# Altium PCB H桥.PcbDoc
Units mm, origin at the board's own origin, x right, y up, seen from the top; angles counter-clockwise.
Board outline 152.4 x 101.6 mm, 2 copper layers (Top Layer, Bottom Layer); 33 components, 21 nets, 103 pads, 42 vias.
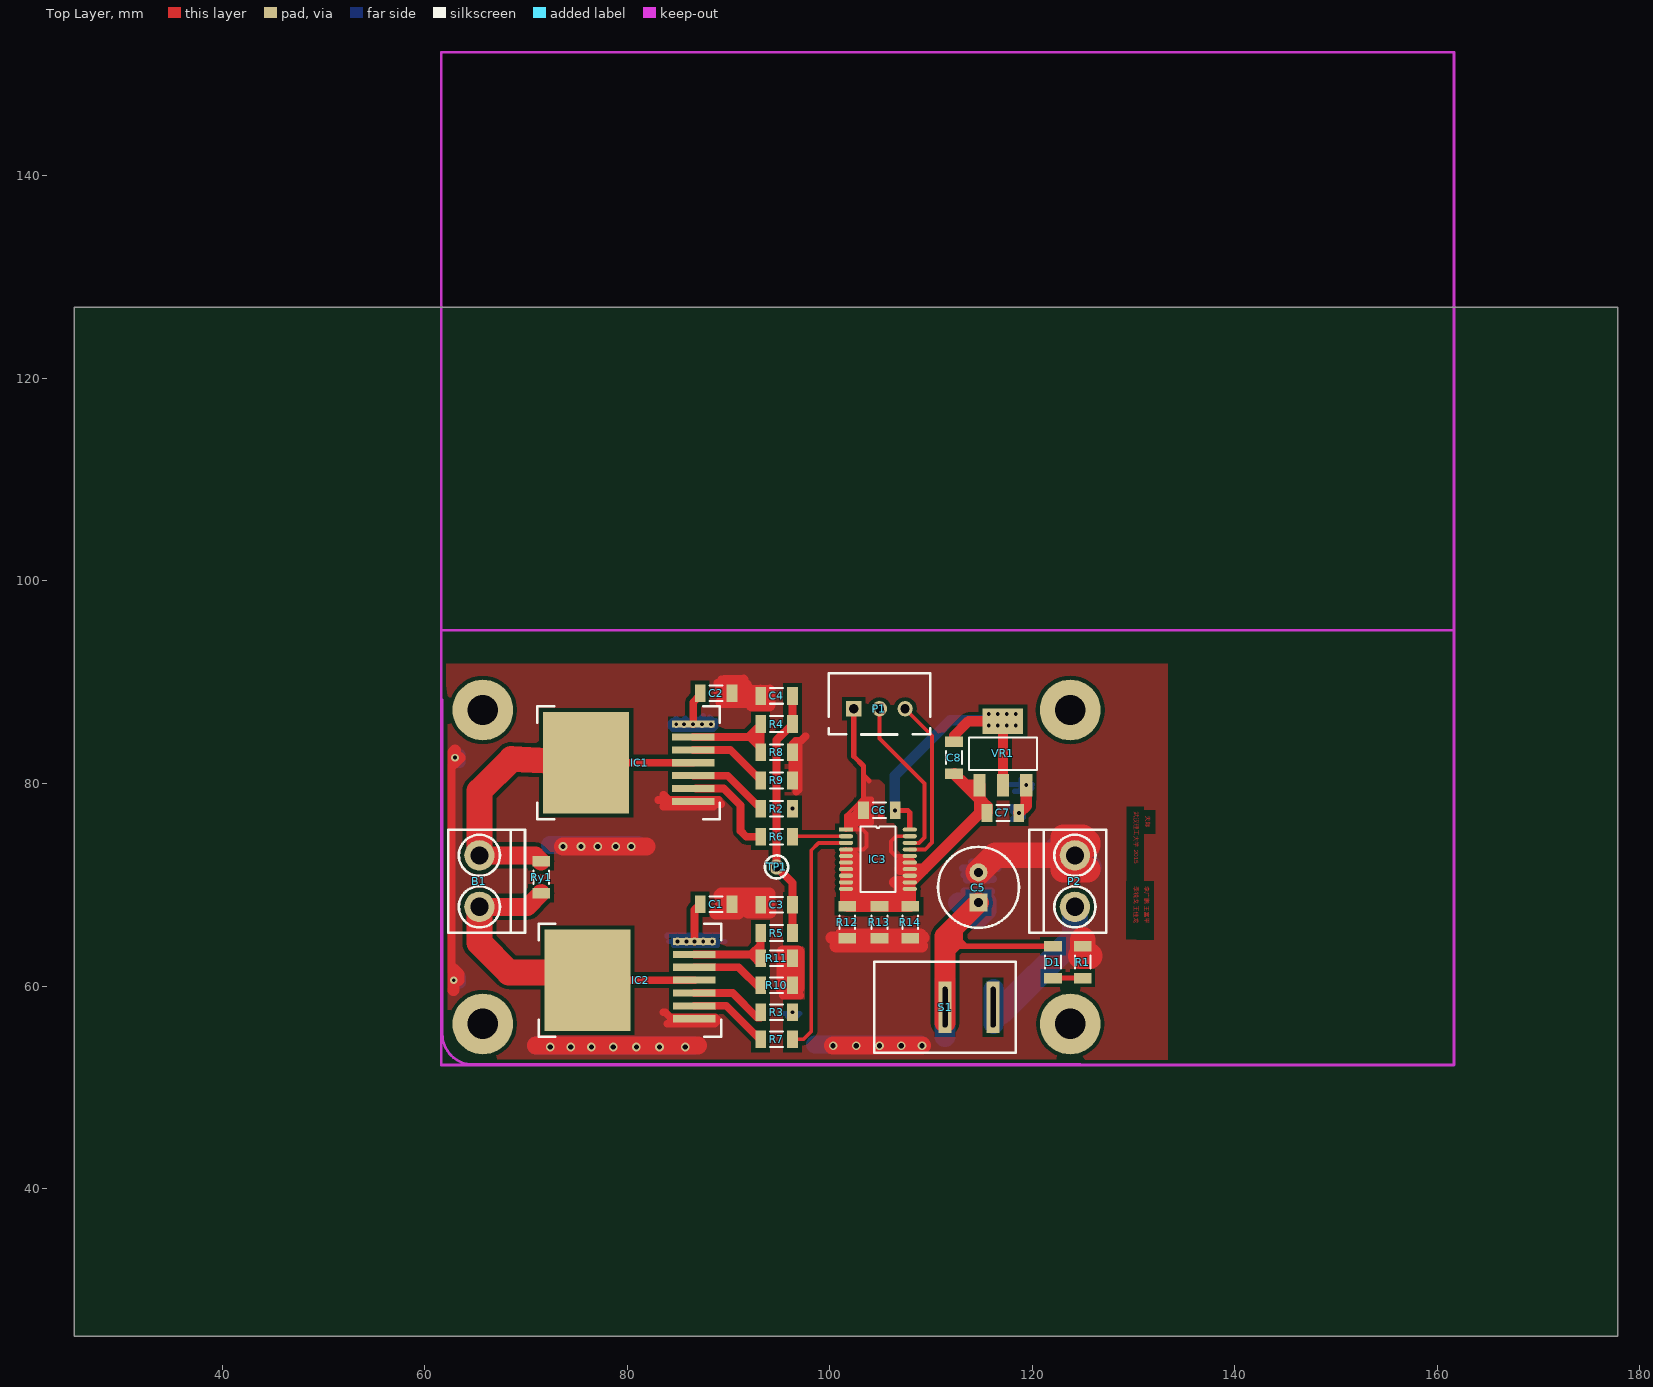
[diagram p0: Top Layer view]
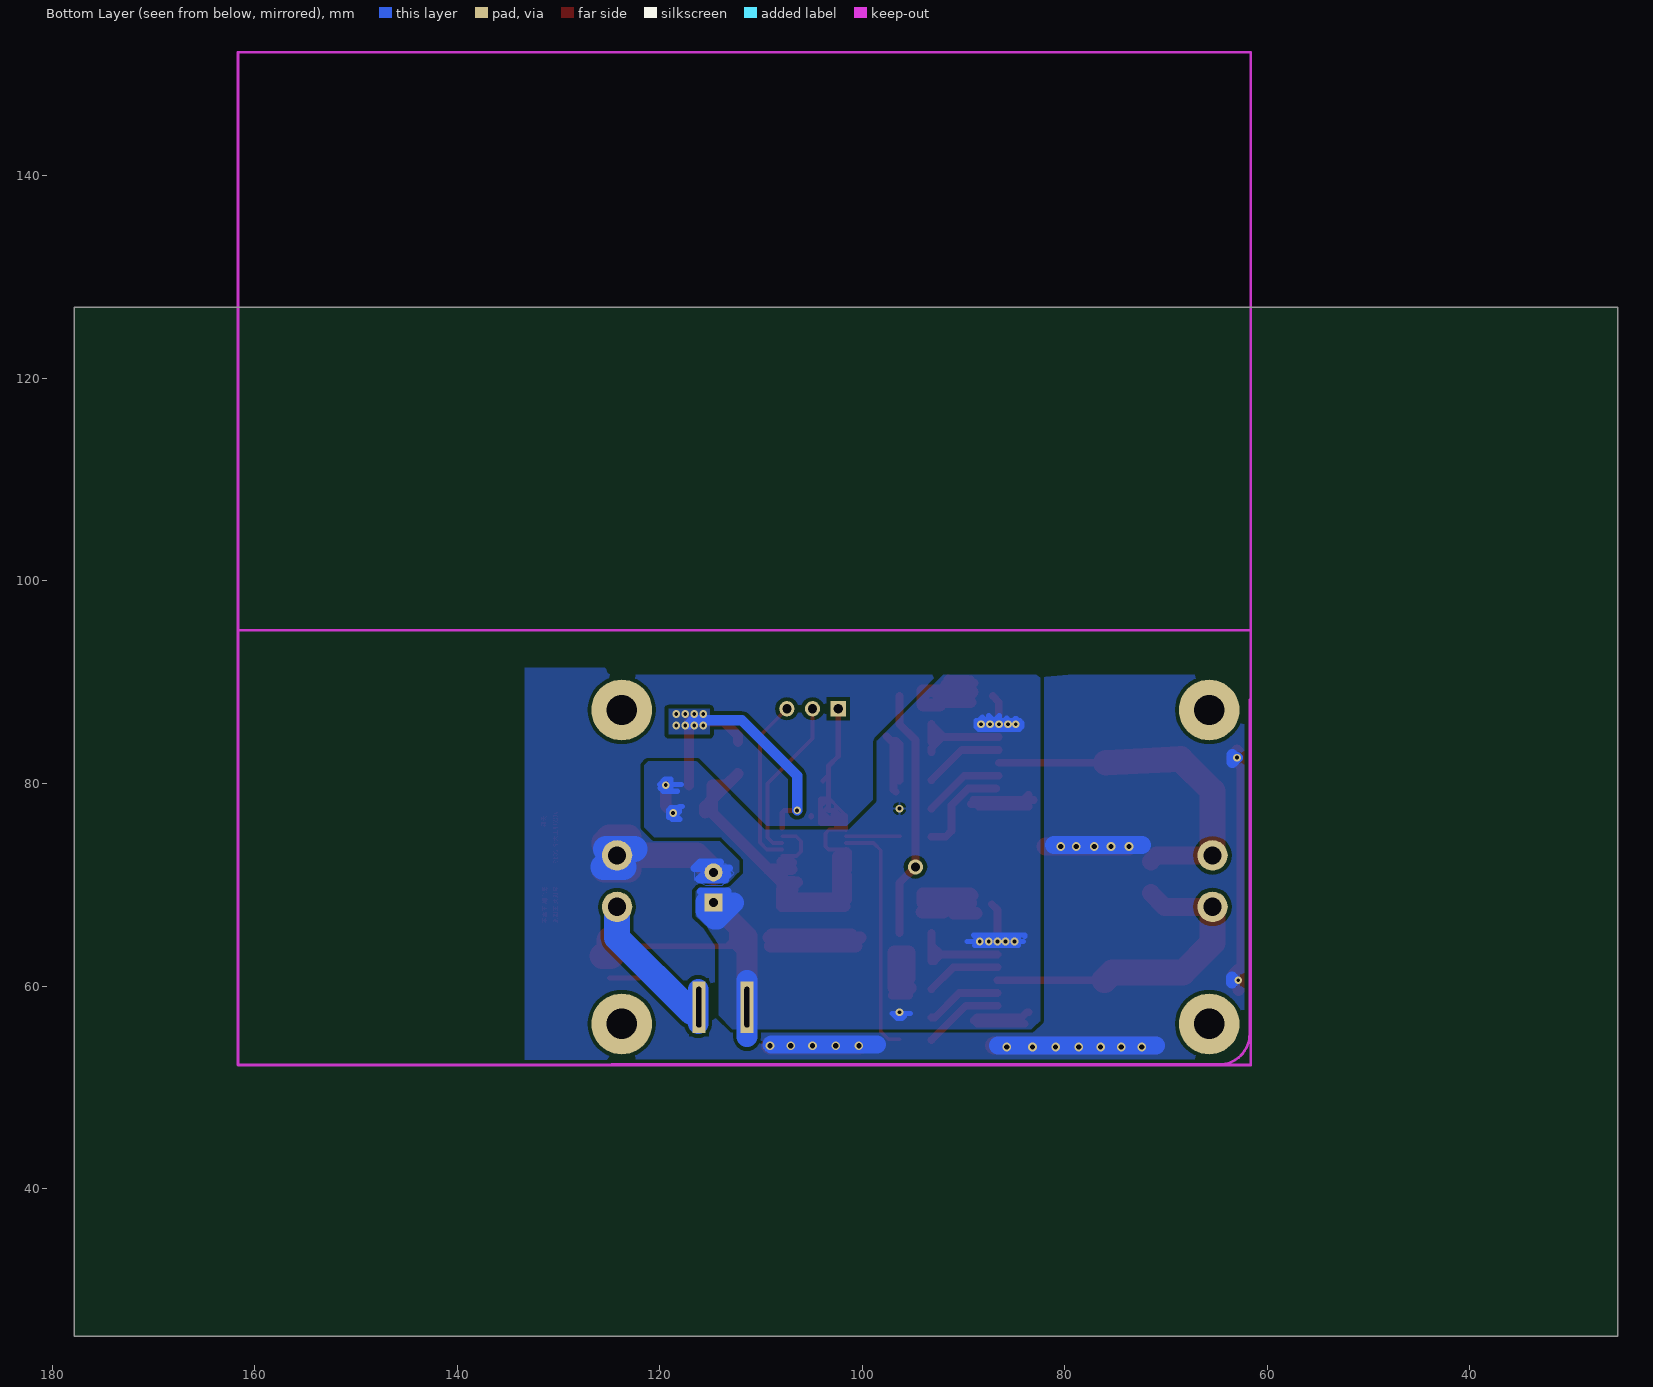
[diagram p1: Bottom Layer view, seen from below]

## Layer stack, top to bottom
Top Layer: signal copper 0.0356
Dielectric: dielectric 0.32, FR-4, Dk 4.8
Bottom Layer: signal copper 0.0356

## Board outline
25.4,25.4 177.8,25.4 177.8,127 25.4,127

## Design rules (kind name [scope] priority, off if disabled: settings)
Clearance [All] p1: gap=0.381
PolygonConnect [All] p1: connectstyle=Relief reliefconductorwidth=0.254 reliefentries=4 polygonreliefangle="90 Angle" airgapwidth=0.254
RoutingVias [All] p1: holewidth=0.711 width=1.27 viastyle="Through Hole" minholewidth=0.711 minwidth=1.27 maxholewidth=0.711 maxwidth=1.27
SolderMaskExpansion [All] p1: expansion=0.102
Width [All] p1: maxlimit=25.4 minlimit=0.381 preferedwidth=1.524 toplayer_maxwidth=2.54 minimp=50.000000 maximp=50.000000 favimp=50.000000
28 further rules are at their usual default settings.

## Components (designator, comment, footprint, x,y, rotation, side; value= is the part's Value field where it differs from the comment)
B1 "Motor" KF301-2P 65.405,70.358 r90 top
C1 "Cap Pol1" 1206(2) 88.773,68.072 r0 top
C2 "Cap Pol1" 1206(2) 88.773,88.9 r0 top
C3 "Cap" 1206(2) 94.742,68.014 r0 top
C4 "Cap" 1206(2) 94.742,88.646 r0 top
C5 "330uF" Inductor/8mm 114.681,69.723 r0 top
C6 "100nF" 1206(2) 104.902,77.343 r0 top
C7 "10uF" 1206(2) 117.094,77.089 r180 top
C8 "10uF" 1206(2) 112.268,82.55 r270 top
D1 "LED" 1206(2) 122.047,62.357 r270 top
IC1 "BTN7960" PG-TO263-7-1 87.63,82.042 r90 top
IC2 "BTN7960" PG-TO263-7-1 87.757,60.579 r90 top
IC3 "74LVC245" "TSSOP20 74lvc245" 104.775,72.517 r0 top
P1 "Header 3" XH2.54_3P 104.902,87.376 r0 top
P2 "Header 2" KF301-2P 124.206,70.358 r270 top
R1 "10K" 1206(2) 124.968,62.357 r270 top
R2 "Res2" 1206(2) 94.742,77.516 r0 top
R3 "Res2" 1206(2) 94.742,57.404 r180 top
R4 "Res2" 1206(2) 94.742,85.864 r0 top
R5 "Res2" 1206(2) 94.742,65.232 r0 top
R6 "Res2" 1206(2) 94.742,74.734 r180 top
R7 "Res2" 1206(2) 94.742,54.737 r0 top
R8 "Res2" 1206(2) 94.742,83.081 r180 top
R9 "Res2" 1206(2) 94.742,80.299 r180 top
R10 "Res2" 1206(2) 94.742,60.071 r180 top
R11 "Res2" 1206(2) 94.742,62.738 r180 top
R12 "0R" 1206(2) 101.727,66.294 r90 top
R13 "0R" 1206(2) 104.902,66.294 r90 top
R14 "0R" 1206(2) 107.95,66.294 r90 top
Ry1 "" 1206(2) 71.501,70.739 r270 top
S1 "SW-SPST" switch-black 111.379,57.912 r90 top
TP1 "tp" TP1 94.742,71.755 r0 top
VR1 "LM1117-3.3" SOT-223 117.094,82.931 r0 top

## Footprints (in the part's own frame and the unit in brackets; to place one, negate y for a bottom-side part, rotate by r counter-clockwise, add the part's x,y. Pads: shape width x height; smd on the part's side, far side on the other; paste and mask are expansions set on the pad)
1206(2) [mm]
  rect 1.05x1.75 smd: 1(-1.575,0) 2(1.575,0)
  silkscreen extent -0.65,-0.77 0.65,0.77, body extent -1.6,-0.8 1.6,0.8, height 1.6
Inductor/8mm [mil]
  rect 70x70 hole 35: 1(0,-59.06)
  round 70 hole 35: 2(0,59.06)
  silkscreen extent -157,-157 157,158
KF301-2P [mm]
  round 3 hole 1.8: 1(-2.54,0) 2(2.54,0)
  silkscreen extent -5.08,-4.5 5.08,3.1
PG-TO263-7-1 [mm]
  rect 0.7x4.2 smd: 1(-3.81,1.123) 2(-2.54,1.123) 3(-1.27,1.123) 4(0,1.123) 5(1.27,1.123) 6(2.54,1.123) 7(3.81,1.123)
  rect 10x8.5 smd: 8(0,11.684)
  silkscreen extent -5.59,-1.52 5.59,16.51
SOT-223 [mm]
  rect 1.2x2.2 smd: 1(-2.3,-3.1) 2(0,-3.1) 3(2.3,-3.1)
  rect 4x2.5 smd: 4(0,3.2)
  silkscreen extent -3.35,-1.62 3.35,1.62
switch-black [mm]
  rect 4.5x0.7 on Top Overlay: 0(0,4.75)
  rect 5.08x1.27 hole 0.5 slot 4 at 0 deg: 1(0,-4.75) 2(0,0)
  silkscreen extent -4.5,-7 4.5,7
TP1 [mm]
  round 1.5 hole 0.9: 1(0,0)
  silkscreen extent -1.14,-1.14 1.14,1.14
"TSSOP20 74lvc245" [mm]
  rect 1.4x0.4 smd: 1(-3.175,2.921)
  oval 1.4x0.4 smd: 2(-3.175,2.271) 3(-3.175,1.621) 4(-3.175,0.971) 5(-3.175,0.321) 6(-3.175,-0.329) 7(-3.175,-0.979) 8(-3.175,-1.629) 9(-3.175,-2.279) 10(-3.175,-2.929) 11(3.125,-2.929) 12(3.125,-2.279) 13(3.125,-1.629) 14(3.125,-0.979) 15(3.125,-0.329) 16(3.125,0.321) 17(3.125,0.971) 18(3.125,1.621) 19(3.125,2.271) 20(3.125,2.921)
  silkscreen extent -1.74,-3.25 1.69,3.25
XH2.54_3P [mm]
  rect 1.5x1.5 hole 0.9: 1(-2.54,0)
  round 1.5 hole 0.9: 2(0,0) 3(2.54,0)
  silkscreen extent -5,-2.54 5,3.5

## Part data
B1: library part "Motor Servo", "Servo Motor"
C1 C2: "Polarized Capacitor (Radial)"
C3 C4: "Capacitor"
C5 C7 C8: library part "Cap Pol1", "Polarized Capacitor (Radial)"
C6: library part Cap, "Capacitor"
D1: "Typical INFRARED GaAs LED"
P1: "Header, 3-Pin"
P2: "Header, 2-Pin"
R1 R12 R13 R14 Ry1: library part Res, "Resistor"
R2 R3 R4 R5 R6 R7 R8 R9 R10 R11: "Resistor"
S1: "Single-Pole, Single-Throw Switch"
TP1: library part TP
VR1: library part Volt_Reg_1117, "Voltage Regulator"

## Free pads (board coordinates)
  round 6 hole 3: ""(65.742,56.255) ""(65.742,87.255) ""(123.742,56.255) ""(123.742,87.255)

## Via types
v1: diameter 0.762, hole 0.381, Top Layer to Bottom Layer, 25 vias
v2: diameter 0.864, hole 0.508, Top Layer to Bottom Layer, 17 vias

## Nets (pads, with @x,y where several pads share a name; then routed paths per layer and width w, separated by ;. In a path a pad name is that pad's centre, name@x,y a point inside that pad or via, vN(x,y) a via of type N, cw(c..) or ccw(c..) an arc to the next point about the centre after c; other vN are vias at no path point)
EGND: C1.2 C2.2 C3.1 C4.1 C5.2 IC1.1 IC2.1 P2.1 R1.1 R8.1 R9.1 R10.1 R11.1 R12.1 R13.1 R14.1 | length 285.4
  Top Layer w0.737: 89.569,90.366 91.498,90.366
  Top Layer w0.762: 62.644,59.861 62.644,82.982 ; 83.058,78.359 84.122,78.359 ; 83.566,57.404 83.741,57.404 84.249,56.896 88.681,56.896 88.972,56.604 88.629,56.261 83.947,56.261 ; 83.566,77.724 88.511,77.724 ; 83.566,78.867 83.614,78.867 84.122,78.359 ; IC1.1@86.761,77.978 89.281,77.978 ; 89.281,90.297 90.829,90.297 ; 91.498,90.366 91.567,90.297 90.829,90.297 ; 91.694,89.662 91.44,89.916 90.448,89.916 ; R10.1@96.317,59.667 96.317,59.817 R10.1@96.317,59.995 ; 96.317,61.2 R10.1 ; R11.1@96.317,62.449 R10.1 ; R9.1 R8.1 96.317,83.871 96.647,84.201 ; 96.696,79.17 96.901,79.375 96.901,83.947 96.647,84.201 ; 97.096,59.041 97.082,59.055 95.377,59.055 96.139,59.817 R10.1@96.317,59.995 ; 97.604,84.673 97.158,84.227 96.673,84.227 96.647,84.201 ; 84.122,78.359 89.027,78.359 88.9,78.232 IC1.1 84.249,78.232 84.122,78.359 ; 90.448,89.916 90.321,89.789 90.321,89.689 90.348,89.662 89.154,89.662 88.9,89.916 90.448,89.916 ; 90.448,89.916 90.829,90.297 ; R10.1@96.317,59.995 R10.1
  Top Layer w1.143: v1(62.865,60.566) 62.865,59.607 62.821,59.563 62.821,61.722 63.363,61.181 63.363,60.564 ; v1(62.992,82.55) v1@62.992,82.634 ; 63.45,82.556 62.821,81.928 v1@62.821,82.805 ; 89.281,88.011 91.821,88.011 ; R12.1 R13.1 R14.1 ; v1@62.821,82.805 62.821,83.098 62.992,83.268 v1@62.992,82.634 ; v1@62.821,82.805 v1@62.992,82.634
  Top Layer w1.27: 88.773,67.183 90.932,67.183 C1.2@89.916,68.199 ; 89.281,68.199 C1.2@89.916,68.199 ; 89.281,88.9 89.154,89.027 92.075,89.027 92.456,88.646 91.948,88.138 92.329,87.757 93.98,87.757 93.98,89.154 91.186,89.154 91.694,89.662 ; 91.948,67.31 94.107,67.31 ; 95.25,59.817 R10.1@95.859,59.817 ; 100.203,64.77 R12.1@101.072,64.77 ; 100.598,63.94 109.079,63.94 108.523,64.496 101.072,64.496 R12.1@101.072,64.77 ; C1.2@89.916,68.199 89.154,68.961 89.302,69.109 93.98,69.109 93.98,68.199 C1.2@89.916,68.199 ; R10.1@95.859,59.817 95.538,60.138 95.538,60.545 95.371,60.712 95.371,63.341 96.855,63.341 96.878,63.318 96.878,59.817 96.317,59.817 96.139,59.817 R10.1@95.859,59.817 ; R12.1@101.072,64.77 109.22,64.77 108.966,65.024 101.072,65.024 R12.1@101.072,64.77
  Top Layer w1.778: 70.993,54.102 86.995,54.102 ; v2(73.66,73.787) v2(75.438,73.787) v2(77.089,73.787) v2(78.867,73.787) v2(80.391,73.787) 81.915,73.787 ; v2(100.33,54.102) v2(102.616,54.102) v2(104.902,54.102) v2(107.061,54.102) v2(109.093,54.102)
  Top Layer w2.54: C5.2 116.356,72.898 P2.1@123.063,72.898 ; P2.1 P2.1@123.063,72.898 ; 124.768,62.958 125.672,62.958 ; R1.1 124.968,64.54 ; 125.476,71.501 123.063,71.501 P2.1@123.063,72.898 ; 125.476,73.914 125.476,74.168 124.968,74.676 123.063,74.676 P2.1@123.063,72.898
  Bottom Layer w0.762: 113.157,71.628 116.586,71.628 115.993,72.221 114.049,72.221 ; 113.284,70.993 C5.2@114.371,70.993 ; 113.538,70.485 113.943,70.485 ; C5.2 C5.2@114.451,70.993 ; C5.2@115.245,70.739 C5.2@114.625,70.739 ; 116.113,70.577 115.789,70.577 ; 113.943,70.485 C5.2@114.979,70.485 ; 113.943,70.485 113.863,70.485 114.117,70.739 C5.2@114.197,70.739 ; C5.2@114.197,70.739 C5.2@114.625,70.739 ; C5.2@114.197,70.739 C5.2@114.411,70.953 ; C5.2@114.197,70.739 114.035,70.577 115.789,70.577 ; C5.2@114.371,70.993 C5.2@114.451,70.993 ; C5.2@114.371,70.993 C5.2@114.411,70.953 ; C5.2@114.411,70.953 C5.2@114.451,70.993 ; C5.2@114.411,70.953 C5.2@114.625,70.739 ; C5.2@114.451,70.993 C5.2@114.991,70.993 ; C5.2@114.979,70.485 115.697,70.485 115.789,70.577 ; C5.2@114.979,70.485 115.499,70.485 C5.2@114.991,70.993 ; C5.2@114.991,70.993 115.697,70.993 115.951,70.739 115.789,70.577
  Bottom Layer w1.143: v1(62.992,82.55) 63.45,82.092 63.45,82.854 ; 63.487,60.312 63.487,60.86
  Bottom Layer w1.778: 70.993,54.102 86.614,54.102 ; 72.39,73.914 81.066,73.914 ; 98.552,54.229 v2@108.966,54.229
  Bottom Layer w2.54: 122.477,73.533 125.327,73.533 123.549,71.755 125.583,71.755
  other v2: 72.39,53.975 74.422,53.975 76.454,53.975 78.613,53.975 80.899,53.975 83.185,53.975 85.725,53.975
GND: C6.1 C7.2 C8.2 IC3.1 IC3.4 IC3.5 IC3.6 IC3.7 IC3.8 IC3.9 IC3.10 IC3.11 IC3.12 IC3.13 IC3.14 IC3.15 IC3.16 IC3.19 P1.1 R12.2 R13.2 R14.2 VR1.1 | length 96.5
  Top Layer w0.381: IC3.4 103.333,73.488 103.632,73.787 103.632,75.057 103.251,75.438 IC3.1 ; 101.6,76.835 101.727,76.962 ; C6.1@102.946,76.962 102.616,76.962 ; 103.327,78.359 103.124,78.359 102.616,77.851 ; IC3.16 106.486,72.838 106.045,73.279 106.045,74.295 106.538,74.788 IC3.19 ; 101.727,76.962 102.235,76.962 ; 101.727,76.962 102.616,77.851 ; 102.235,76.962 102.616,77.343 ; 102.235,76.962 102.616,76.962 ; 102.616,76.962 102.616,77.343 ; 102.616,77.343 102.616,77.851
  Top Layer w0.432: IC3.1 101.6,76.835
  Top Layer w0.508: IC3.8 IC3.7 ; 102.108,76.073 102.554,76.073 ; P1.1 102.362,82.677 103.327,81.712 103.327,80.823 ; 102.616,77.343 C6.1 C6.1@103.327,77.693 ; 103.815,78.288 103.815,78.181 C6.1@103.731,78.181 ; 103.886,80.264 103.505,80.645 ; 105.029,76.708 105.029,76.835 ; 106.68,70.612 107.9,70.612 ; R14.2@107.9,68.173 107.9,68.648 107.9,69.52 IC3.11 ; IC3.12 107.9,70.612 ; IC3.13 107.9,70.612 ; 102.554,76.073 104.072,76.073 104.106,76.107 104.106,76.674 ; 102.554,76.073 102.554,75.692 101.981,75.692 101.981,76.454 101.854,76.581 103.333,76.581 103.886,77.134 C6.1@103.327,77.693 ; 102.554,76.073 102.554,76.135 103.567,76.135 104.106,76.674 ; C6.1@103.327,77.693 C6.1@103.327,78.181 ; C6.1@103.327,78.181 103.327,78.359 103.327,80.645 ; C6.1@103.327,78.181 C6.1@103.731,78.181 ; 103.327,80.645 103.505,80.645 ; 103.327,80.645 103.327,80.823 ; 103.327,80.823 103.505,80.645 ; C6.1@103.731,78.181 103.44,78.472 104.106,78.472 104.106,77.806 ; C6.1@103.731,78.181 104.106,77.806 ; 104.106,76.674 104.106,77.806
  Top Layer w1.143: 101.6,68.504 IC3.10 IC3.9 IC3.8 ; IC3.7 IC3.6 IC3.5 101.6,73.152 ; R12.2 102.427,68.569 102.427,68.648 ; 101.744,68.648 102.427,68.648 ; R12.2@101.854,67.869 R13.2 R13.2@105.029,67.869 ; 102.427,72.833 102.427,68.648 ; R13.2@105.283,67.869 R14.2 107.95,68.648 ; 106.433,70.238 IC3.12 ; 106.883,69.52 107.9,69.52 107.95,69.52 107.95,68.648 ; 106.971,71.538 IC3.14 ; 107.009,72.188 IC3.15 ; IC3.11 IC3.12 ; IC3.13 IC3.14 ; IC3.15@107.9,72.263 IC3.15 ; C8.2 113.412,79.831 ; C7.2 115.519,77.724 114.794,78.449 ; 102.427,68.648 107.9,68.648 107.95,68.648 ; IC3.12 107.957,70.238 109.257,71.538 ; IC3.14 IC3.15 ; IC3.14 109.257,71.538 ; 109.257,71.538 114.794,77.075 114.794,78.449 ; 113.412,79.831 VR1.1 114.794,78.449 ; 113.412,79.831 114.794,78.449
MOTTO_IN1: IC3.2 R6.1 | length 5.3
  Top Layer w0.381: R6.1@96.281,74.788 IC3.2
MOTTO_IN2: IC3.3 R7.2 | length 23.8
  Top Layer w0.381: R7.2 97.409,54.737 98.171,55.499 98.171,73.406 98.903,74.138 IC3.3
NetB1_1: B1.1 IC2.4 IC2.8 Ry1.2 | length 33
  Top Layer w0.762: IC2.8 IC2.4
  Top Layer w1.778: B1.1 70.155,67.818 Ry1.2
  Top Layer w2.54: B1.1 65.405,64.262 68.326,61.341 75.311,61.341 IC2.8
NetB1_2: B1.2 IC1.4 IC1.8 Ry1.1 | length 35.1
  Top Layer w0.762: IC1.8 IC1.4
  Top Layer w1.778: B1.2 70.917,72.898 Ry1.1
  Top Layer w2.54: B1.2 65.405,79.248 68.58,82.423 IC1.8
NetC3_2: C3.2 C4.2 R4.2 R5.2 TP1.1 | length 24.7
  Top Layer w0.762: R5.2 C3.2 96.317,70.18 TP1.1 94.742,84.289 R4.2 C4.2
NetD1_2: D1.2 R1.2 | length 2.9
  Top Layer w0.508: D1.2 R1.2
NetIC1_2: IC1.2 R6.2 | length 9.9
  Top Layer w0.762: IC1.2@86.761,79.502 89.535,79.502 91.186,77.851 91.186,75.311 91.763,74.734 R6.2
NetIC1_3: IC1.3 R2.1 | length 8
  Top Layer w0.762: IC1.3 89.911,80.772 R2.1
NetIC1_5: IC1.5 R9.2 | length 7.9
  Top Layer w0.762: IC1.5 90.17,83.312 R9.2@93.167,80.315
NetIC1_6: IC1.6 R4.1 R8.2 | length 12.4
  Top Layer w0.762: IC1.6 91.885,84.582 R4.1 93.167,84.062 ; 92.278,84.455 92.659,84.074 92.583,84.074 ; 93.04,84.963 92.71,84.963 92.202,84.455 92.583,84.074 ; R8.2 93.167,83.49 92.583,84.074
NetIC2_2: IC2.2 R7.1 | length 7.9
  Top Layer w0.762: IC2.2 89.789,58.039 R7.1@93.167,54.661
NetIC2_3: IC2.3 R3.2 | length 7.5
  Top Layer w0.762: IC2.3 90.424,59.309 92.849,56.884 R3.2@93.167,56.884
NetIC2_5: IC2.5 R10.2 | length 7.4
  Top Layer w0.762: IC2.5 90.985,61.849 R10.2@93.167,59.667
NetIC2_6: IC2.6 R5.1 R11.2 | length 11.4
  Top Layer w0.762: IC2.6 92.202,63.119 ; R11.2@92.872,62.449 92.202,63.119 ; R11.2@92.913,63.119 92.202,63.119 ; R11.2@93.167,62.449 93.167,64.084 ; R5.1 93.167,64.084 ; 92.202,63.119 93.167,64.084
NetIC3_17: IC3.17 P1.3 | length 16.8
  Top Layer w0.381: P1.3 110.109,84.709 110.109,74.168 109.429,73.488 IC3.17
NetIC3_18: IC3.18 P1.2 | length 16.2
  Top Layer w0.381: P1.2 104.902,84.455 109.347,80.01 109.347,74.676 108.809,74.138 IC3.18
VCC: C1.1 C2.1 C5.1 C7.1 D1.1 IC1.7 IC2.7 R2.2 R3.1 S1.2 VR1.3 | length 114.1
  Top Layer w0.508: 111.787,64.921 112.23,64.478 ; 112.217,63.373 112.776,63.932 ; 112.368,63.932 112.776,63.932 ; 112.738,64.478 112.23,64.478 ; 112.903,65.405 112.903,64.478 ; D1.1 113.449,63.932 ; 112.23,64.478 112.776,63.932 ; 112.776,63.932 112.903,64.059 112.903,64.478 ; 112.776,63.932 113.449,63.932 ; 112.903,64.478 113.449,63.932
  Top Layer w0.762: v1(86.487,85.852) 86.507,85.872 86.507,88.031 C2.1@87.122,88.646 ; v1(86.634,64.389) 86.634,67.508 C1.1
  Top Layer w1.143: v1(118.669,77.089) 119.394,77.814 v1(119.394,79.831)
  Top Layer w2.032: S1.2@111.379,56.388 S1.2 111.379,64.921 C5.1
  Bottom Layer w0.508: 83.947,64.897 83.947,65.024 89.027,65.024 v1(88.392,64.389) ; 84.074,64.389 84.57,64.389 ; v1(84.836,85.852) v1(85.598,85.852) v1(86.487,85.852) v1(87.376,85.852) v1(88.265,85.852) 88.76,85.852 88.76,86.203 88.513,86.203 ; v1@88.265,64.516 87.903,64.878 84.57,64.878 84.57,64.389 ; 88.779,85.604 88.532,85.357 84.485,85.357 ; 89.662,64.389 v1@88.499,64.389 ; 95.25,57.277 97.028,57.277 96.533,56.782 96.069,56.782 95.84,57.011 95.873,57.011 ; 117.729,77.724 118.034,77.724 118.211,77.547 ; 117.856,79.883 118.91,79.883 ; 118.16,76.631 117.996,76.467 118.796,76.467 118.071,77.192 118.071,77.406 118.211,77.547 ; 118.222,79.233 119.642,79.233 119.975,79.566 118.91,79.566 118.91,79.883 ; 84.438,86.203 84.485,86.155 ; 84.438,86.203 84.485,86.203 ; 84.438,86.203 84.214,85.979 84.214,85.628 84.485,85.357 ; 84.485,85.357 84.485,86.155 ; 84.485,86.155 84.485,86.203 ; 84.485,86.155 84.788,85.852 v1@84.788,86.203 ; 84.485,86.203 v1@84.788,86.203 ; 84.57,64.389 84.57,63.996 88.893,63.996 v1@88.499,64.389 ; 84.57,64.389 v1(84.963,64.389) v1(85.852,64.389) v1(86.634,64.389) v1(87.503,64.389) v1(88.392,64.389) ; v1@84.788,86.203 85.084,86.203 ; v1@84.788,86.203 84.788,86.395 84.892,86.395 85.084,86.203 ; 85.084,86.203 v1@85.454,86.203 ; v1@85.454,86.203 85.996,86.203 ; v1@85.454,86.203 85.725,86.474 85.996,86.203 ; 85.996,86.203 86.735,86.203 ; 86.735,86.203 86.978,86.203 ; 86.735,86.203 86.463,86.474 86.463,86.717 86.978,86.203 ; 86.978,86.203 88.513,86.203 ; 86.978,86.203 87.503,86.728 87.503,86.33 87.89,86.33 88.138,86.578 88.513,86.203 ; v1(88.392,64.389) v1@88.499,64.389 ; 118.211,77.547 118.261,77.597 118.91,77.597 119.127,77.38 119.127,76.631 v1(118.669,77.089) 118.211,77.547 ; 118.91,79.883 120.015,79.883 119.469,80.429 118.91,80.429 118.91,79.883
  Bottom Layer w0.762: C5.1 114.403,68.223 113.284,69.342 115.951,69.342
  Bottom Layer w2.032: 111.379,54.991 S1.2 111.379,60.579 ; C5.1@114.403,68.223 112.673,68.223 114.3,66.596 114.602,66.596 115.443,67.437 115.443,68.326 114.784,68.326 C5.1
  other v1: 96.317,57.404 96.317,77.516
VCC3.3: C6.2 C8.1 IC3.20 VR1.2 VR1.4 | length 31.8
  Top Layer w0.508: C6.2 107.696,77.343 107.9,77.139 IC3.20@107.9,75.623
  Top Layer w1.016: C8.1 112.268,84.709 113.69,86.131 VR1.4 VR1.2
  Bottom Layer w1.016: v1(106.426,77.343) 106.426,80.772 111.887,86.233 116.713,86.233 117.094,85.852
  other v1: 115.697,85.725 116.586,85.725 117.475,85.725 118.364,85.725 115.697,86.868 116.586,86.868 117.475,86.868 118.364,86.868
VCCIN: P2.2 S1.1 | length 16.9
  Bottom Layer w2.032: S1.1@116.205,56.261 116.205,57.912 S1.1@116.205,59.69
  Bottom Layer w2.54: 116.84,57.404 124.206,64.77 P2.2
pads on no net: S1.0

## Polygon pours and split planes (outlines as drawn)
VCC3.3 on Bottom Layer "Top Layer-VCC3.3" (solid, pour order 2): 115.062,87.376 119.126,87.376 119.126,84.836 115.062,84.836 115.062,87.376
VCC on Bottom Layer "Top Layer-VCC" (solid, pour order 8): 83.058,90.932 83.185,90.805 91.694,90.805 91.948,90.805 93.853,88.9 98.552,84.201 98.552,78.232 101.473,75.311 101.6,75.438 108.839,75.438 109.601,75.438 116.205,82.042 116.332,82.169 120.904,82.169 121.158,82.169 121.539,81.788 121.539,75.946 121.539,75.692 121.285,75.438 120.523,74.676 113.919,74.676 112.014,72.771 111.633,72.39 110.49,71.247 98.552,71.247 95.758,74.041 86.868,74.041 83.82,74.041 82.677,75.184 82.423,75.438 82.423,90.424
VCC on Bottom Layer "Top Layer-VCC" (solid, pour order 14): 82.423,75.438 82.423,56.54 83.312,55.753 83.566,55.978 112.776,55.978 112.903,55.978 113.411,56.428 114.173,57.103 114.173,64.977 114.3,64.977 116.459,66.889 116.459,69.926 116.459,70.039 116.205,70.264 116.078,70.376 110.871,70.376 88.138,70.376 83.82,74.201
VCC on Bottom Layer "Top Layer-VCC" (solid, pour order 16): 83.439,77.089 84.328,76.2 98.044,76.2 98.679,76.2 100.838,74.041 100.965,73.914 111.76,73.914 111.76,71.12 112.141,70.739 113.284,69.596 113.284,68.961 113.284,67.691 111.76,66.167 110.998,66.929 83.312,66.929 83.312,76.708 83.439,76.835
VCC on Bottom Layer "Top Layer-VCC" (solid, pour order 22): 114.046,63.928 113.411,62.992 112.141,64.864 111.125,64.864 111.887,65.987 112.268,66.548 114.808,66.548 115.316,66.548 115.57,66.174
EGND on Bottom Layer "Top Layer-EGND" (solid, remove dead copper, pour order 26): 61.999,91.44 133.338,91.44 133.338,52.579 133.477,52.451 62.692,52.451 62.692,52.579 61.722,53.474 61.861,53.601 61.861,91.44
VCC on Bottom Layer "Top Layer-VCC" (solid, remove dead copper, pour order 28): 83.312,55.753 112.823,55.753 114.173,57.103 112.856,58.42 90.932,58.42 84.086,58.42 82.423,56.757 83.312,55.868 83.312,55.753
VCC on Bottom Layer "Top Layer-VCC" (solid, pour order 30): 104.49,75.438 99.332,75.438 99.06,74.824 100.418,71.755 102.047,71.755 105.305,71.755 106.934,75.438
EGND on Bottom Layer "Top Layer-GND" (solid, remove dead copper, pour order 34): 115.456,69.93 115.451,69.925 113.905,69.925 113.844,69.925 112.649,71.12 113.411,71.882 113.411,72.009 115.78,72.009 115.993,72.221 116.586,71.628 116.586,70.485
EGND on Top Layer "Top Layer-EGND" (solid, remove dead copper, pour order 24): 61.733,91.821 66.977,91.821 75.946,91.821 85.605,91.821 100.232,91.821 113.065,91.821 131.832,91.821 133.35,91.821 133.35,82.43 133.35,77.026 133.35,52.197 120.931,52.197 107.822,52.197 98.024,52.197 86.985,52.197 72.496,52.197 61.595,52.197 61.595,91.821 61.733,91.821
GND on Top Layer "Top Layer-GND" (solid, remove dead copper, pour order 32): 107.95,67.869 107.9,67.919 107.9,72.838 107.248,72.838 106.68,73.406 106.68,75.692 106.426,75.946 106.299,76.073 106.045,76.073 105.664,76.454 105.41,76.708 105.41,79.883 105.029,80.264 104.902,80.391 103.378,80.391 103.378,78.613 101.727,76.962 101.6,76.835 101.6,75.438 102.235,75.438 102.743,74.93 102.743,74.041 102.743,73.764 102.466,73.488 101.6,73.488 101.6,67.691

## Keep-outs
Keep-Out Layer:
  lines w0.254: 61.633,95.123 161.633,95.123 ; 61.742,88.255 61.742,55.255 ccw(c64.742,55.255) 64.742,52.255 124.742,52.255 ; 61.633,52.197 161.633,52.197 161.633,152.197 61.633,152.197 61.633,52.197

## Other copper
Top Layer:
  text "武汉理工大学 2015" at 129.921,77.216 h0.76 r270
  text "天际" at 131.064,76.835 h0.76 r270
  text "李锐戈 王佳龙" at 129.921,69.85 h0.76 r270
  text "李广鹏 王富平" at 130.937,69.85 h0.76 r270

## Silkscreen, mask and mechanical layers (free items; w line width, h text height)
Mechanical 15:
  lines w0.254: 124.742,52.255 ccw(c124.742,55.255) 127.742,55.255 127.742,88.255 ccw(c124.742,88.255) 124.742,91.255
Drill Drawing:
  lines w1: 128.778,53.467 128.778,90.17 ; 132.842,53.594 132.842,90.297